# Altium PCB FPGA_MAIN.PcbDoc
Units mm, origin at the board's own origin, x right, y up, seen from the top; angles counter-clockwise.
Board outline 32.89 x 102.62 mm, 2 copper layers (Top Layer, Bottom Layer); 11 components, 56 nets, 161 pads, 127 vias.
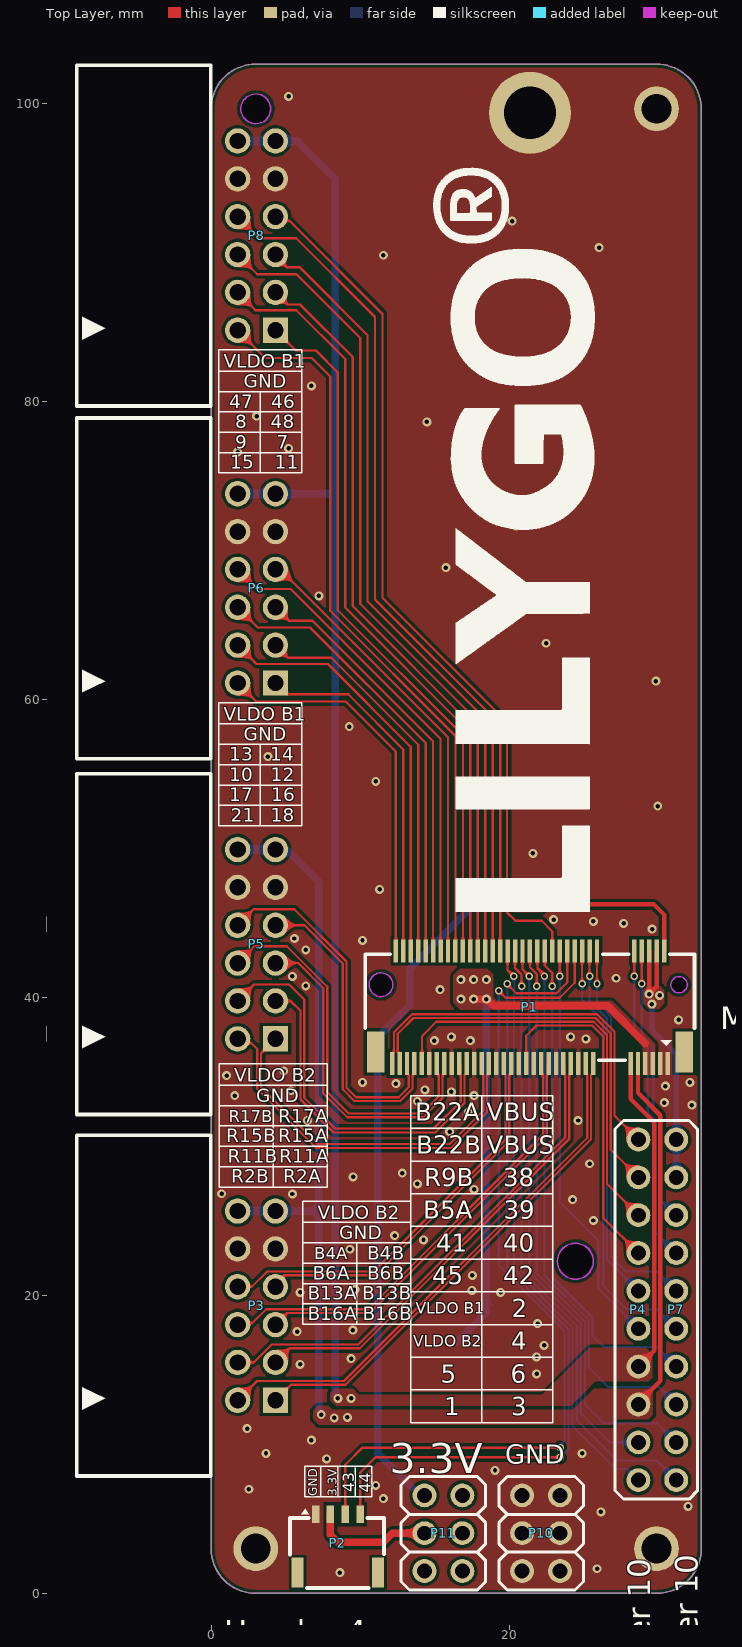
[diagram p0: Top Layer view]
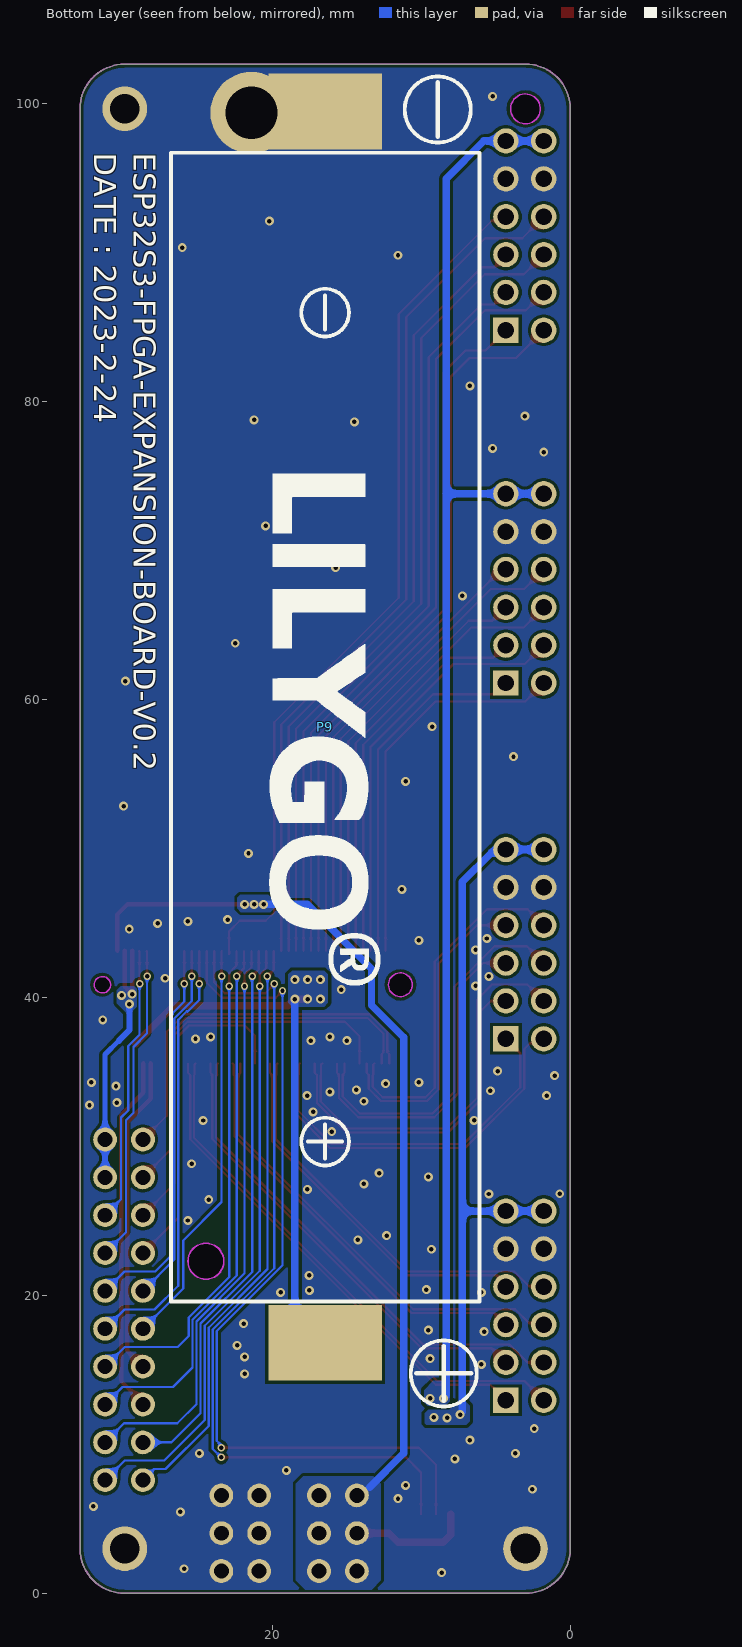
[diagram p1: Bottom Layer view, seen from below]

## Layer stack, top to bottom
Top Solder: solder mask 0.0102, Solder Resist, Dk 3.5
Top Layer: signal copper 0.0356
Dielectric 1: dielectric 0.32, FR-4, Dk 4.8
Bottom Layer: signal copper 0.0356
Bottom Solder: solder mask 0.0102, Solder Resist, Dk 3.5

## Board outline
0,3 0,99.616 cw(c3,99.616) 3,102.616 29.893,102.616 cw(c29.893,99.616) 32.893,99.616 32.893,99.568 32.893,3 cw(c29.893,3) 29.893,0 3,0 cw(c3,3)
cut-out: 3,98.616 cw(c3,99.616) 2,99.616 cw(c3,99.616) 3,100.616 cw(c3,99.616) 4,99.616 cw(c3,99.616)

## Design rules (kind name [scope] priority, off if disabled: settings)
Clearance [InNet('GND')] p1: gap=0.2 ignorepadtopadclearanceinfootprint=TRUE
Clearance Clearance_1 [All] p2: gap=0.102 ignorepadtopadclearanceinfootprint=TRUE
HoleToHoleClearance [All] p1: gap=0 allowstackedmicrovias=TRUE
MinimumSolderMaskSliver [All] p1: minsoldermaskwidth=0
PolygonConnect [All] p1: connectstyle=Direct reliefconductorwidth=0.254 reliefentries=4 polygonreliefangle="90 Angle" airgapwidth=0.254
RoutingVias [All] p1: holewidth=0.3 width=0.5 viastyle="Through Hole" minholewidth=0.25 minwidth=0.4 maxholewidth=10 maxwidth=10
SilkToSilkClearance [All] p1: silktosilkclearance=0
SilkToSolderMaskClearance [IsPad] p1: minsilkscreentomaskgap=0 clearancetoexposedcopper=TRUE
SolderMaskExpansion [All] p1: expansion=0.102 istentingtop=FALSE
Width [All] p1: maxlimit=0.508 minlimit=0.102 preferedwidth=0.203
26 further rules are at their usual default settings.

## Components (designator, comment, footprint, x,y, rotation, side; value= is the part's Value field where it differs from the comment)
P1 "M.2_B_KEY" "M.2 B KEY M" 21.396,39.335 r180 top
P2 "Header 4" H-Header_4P-1.0mm 8.508,3.356 r0 top
P3 "H_PMOD_6x2" "PMOD 6x2" 3.048,19.304 r270 top
P4 "Header 10" 10P_HDR 28.674,19.024 r90 top
P5 "H_PMOD_6x2" "PMOD 6x2" 3.048,43.561 r270 top
P6 "H_PMOD_6x2" "PMOD 6x2" 3.048,67.437 r270 top
P7 "Header 10" 10P_HDR 31.214,19.024 r270 top
P8 "H_PMOD_6x2" "PMOD 6x2" 3.048,91.109 r270 top
P9 "Header 2" BAT电池盒 16.446,58.128 r0 bottom
P10 "Header 3X2" HDR_3x2 22.429,3.81 r90 top
P11 "Header 3X2" HDR_3x2 15.875,3.81 r90 top

## Footprints (in the part's own frame and the unit in brackets; to place one, negate y for a bottom-side part, rotate by r counter-clockwise, add the part's x,y. Pads: shape width x height; smd on the part's side, far side on the other; paste and mask are expansions set on the pad)
10P_HDR [mm]
  round 1.6 hole 1 paste+0: 1(-11.43,0) 2(-8.89,0) 3(-6.35,0) 4(-3.81,0) 5(-1.27,0) 6(1.27,0) 7(3.81,0) 8(6.35,0) 9(8.89,0) 10(11.43,0)
BAT电池盒 [mil]
  rect 300x200 smd mask+2: 1(0,-1626.5) 2(0,1626.5)
  Keep-Out Layer board cut-out: 362.2,1411.02 357.53,1431.52 344.42,1447.96 325.47,1457.08 304.45,1457.08 285.5,1447.96 272.39,1431.52 267.72,1411.02 267.72,1411.02 272.39,1390.52 285.5,1374.08 304.45,1364.96 325.47,1364.96 344.42,1374.08 357.53,1390.52 362.2,1411.02
  silkscreen extent -407,-1518 408,1518
H-Header_4P-1.0mm [mm]
  rect 0.5x1.2 smd: 1(-1.5,1.95) 2(-0.5,1.95) 3(0.5,1.95) 4(1.5,1.95)
  rect 0.8x2 smd: 5(2.7,-1.95) 6(-2.7,-1.95)
  silkscreen extent -3.22,-3 3.1,2.33
HDR_3x2 [mm]
  round 1.6 hole 1 paste+0: 1(-2.314,-0.984) 2(0.226,-0.984) 3(2.766,-0.984) 4(2.766,1.556) 5(0.226,1.556) 6(-2.314,1.556)
  silkscreen extent -3.58,-2.55 4.04,3.13, body extent -3.58,-2.25 4.04,2.83, height 6.17
"M.2 B KEY M" [mm]
  rect 0.3x1.55 smd mask+0.051: 1(-9.25,3.775) 2(-9,-3.775) 3(-8.75,3.775) 4(-8.5,-3.775) 5(-8.25,3.775) 6(-8,-3.775) 7(-7.75,3.775) 8(-7.5,-3.775) 9(-7.25,3.775) 10(-7,-3.775) 11(-6.75,3.775) 20(-4.5,-3.775) 21(-4.25,3.775) 22(-4,-3.775) 23(-3.75,3.775) 24(-3.5,-3.775) 25(-3.25,3.775) 26(-3,-3.775) 27(-2.75,3.775) 28(-2.5,-3.775) 29(-2.25,3.775) 30(-2,-3.775) 31(-1.75,3.775) 32(-1.5,-3.775) 33(-1.25,3.775) 34(-1,-3.775) 35(-0.75,3.775) 36(-0.5,-3.775) 37(-0.25,3.775) 38(0,-3.775) 39(0.25,3.775) 40(0.5,-3.775) 41(0.75,3.775) 42(1,-3.775) 43(1.25,3.775) 44(1.5,-3.775) 45(1.75,3.775) 46(2,-3.775) 47(2.25,3.775) 48(2.5,-3.775) 49(2.75,3.775) 50(3,-3.775) 51(3.25,3.775) 52(3.5,-3.775) 53(3.75,3.775) 54(4,-3.775) 55(4.25,3.775) 56(4.5,-3.775) 57(4.75,3.775) 58(5,-3.775) 59(5.25,3.775) 60(5.5,-3.775) 61(5.75,3.775) 62(6,-3.775) 63(6.25,3.775) 64(6.5,-3.775) 65(6.75,3.775) 66(7,-3.775) 67(7.25,3.775) 68(7.5,-3.775) 69(7.75,3.775) 70(8,-3.775) 71(8.25,3.775) 72(8.5,-3.775) 73(8.75,3.775) 74(9,-3.775) 75(9.25,3.775)
  rect 1.2x2.75 smd mask+0.051: 76(-10.35,3) 77(10.35,3)
  Keep-Out Layer board cut-out: -9.45,-1.5 -9.504,-1.261 -9.657,-1.07 -9.878,-0.964 -10.122,-0.964 -10.343,-1.07 -10.496,-1.261 -10.55,-1.5 -10.55,-1.5 -10.496,-1.739 -10.343,-1.93 -10.122,-2.036 -9.878,-2.036 -9.657,-1.93 -9.504,-1.739 -9.45,-1.5
  Keep-Out Layer board cut-out: 10.8,-1.5 10.721,-1.153 10.499,-0.874 10.178,-0.72 9.822,-0.72 9.501,-0.874 9.279,-1.153 9.2,-1.5 9.2,-1.5 9.279,-1.847 9.501,-2.125 9.822,-2.28 10.178,-2.28 10.499,-2.125 10.721,-1.847 10.8,-1.5
  silkscreen extent -11.05,-3.56 11.05,3.56
"PMOD 6x2" [mm]
  rect 1.7x1.7 hole 1.1 mask+0.05: 1(6.35,1.27)
  round 1.7 hole 1.1 mask+0.05: 2(6.35,-1.27) 3(3.81,1.27) 4(3.81,-1.27) 5(1.27,1.27) 6(1.27,-1.27) 7(-1.27,1.27) 8(-1.27,-1.27) 9(-3.81,1.27) 10(-3.81,-1.27) 11(-6.35,1.27) 12(-6.35,-1.27)
  silkscreen extent -11.43,-12.07 11.43,-3.07

## Part data
P2: library part H_Header_4
P4 P7: library part H_Header_10
P9: library part H_Header_2
P10 P11: library part H_Header_3X2

## Free pads (board coordinates)
  round 3 hole 2: 1(3,3) 1(29.893,3) 1(29.893,99.616)
  round 5.5 hole 3.5: 1(21.396,99.349)

## Via types
v1: diameter 0.6, hole 0.3, Top Layer to Bottom Layer, tented both sides, 111 vias
v2: diameter 0.5, hole 0.3, Top Layer to Bottom Layer, tented both sides, 16 vias

## Nets (pads, with @x,y where several pads share a name; then routed paths per layer and width w, separated by ;. In a path a pad name is that pad's centre, name@x,y a point inside that pad or via, vN(x,y) a via of type N, cw(c..) or ccw(c..) an arc to the next point about the centre after c; other vN are vias at no path point)
FPGA_IOB4A: P1.45 P3.8 | length 27.2
  Top Layer w0.152: P3.8 1.809,20.605 2.767,20.605 3.764,21.602 10.901,21.602 19.751,30.452 19.751,34.772 19.72,34.803 19.72,35.486 P1.45
FPGA_IOB4B: P1.43 P3.7 | length 25.1
  Top Layer w0.152: P3.7 4.318,20.722 4.943,21.348 11.007,21.348 20.005,30.346 20.005,34.794 20.146,34.935 P1.43
FPGA_IOB5A: P1.39 P4.7 | length 23.1
  Top Layer w0.152: P1.39 21.146,37.413 21.834,38.101 25.58,38.101 26.316,37.365 26.316,25.192 P4.7
FPGA_IOB6A: P1.35 P3.6 | length 30.6
  Top Layer w0.152: P3.6 1.878,18.134 2.767,18.134 3.695,19.062 10.54,19.062 22.269,30.791 22.269,34.812 22.146,34.935 P1.35
FPGA_IOB6B: P1.33 P3.5 | length 28.4
  Top Layer w0.152: P3.5 5.092,18.808 10.645,18.808 22.523,30.686 22.523,34.751 22.572,34.8 22.572,35.486 P1.33
FPGA_IOB13A: P1.29 P3.4 | length 33.3
  Top Layer w0.152: P3.4 2.864,15.494 4.069,16.699 9.878,16.699 23.77,30.591 23.77,34.74 23.72,34.79 23.72,35.486 P1.29
FPGA_IOB13B: P1.27 P3.3 | length 31
  Top Layer w0.152: P3.3 5.267,16.443 9.981,16.443 24.024,30.486 24.024,34.813 24.146,34.935 P1.27
FPGA_IOB16A: P1.23 P3.2 | length 35.8
  Top Layer w0.152: P3.2 3.076,14.252 8.921,14.252 25.241,30.573 25.241,34.772 25.22,34.794 25.22,35.486 P1.23
FPGA_IOB16B: P1.21 P3.1 | length 33.6
  Top Layer w0.152: P3.1 5.362,13.998 9.026,13.998 25.495,30.468 25.495,34.785 25.646,34.935 P1.21
FPGA_IOB22A: P1.75 P4.10 | length 25.8
  Top Layer w0.152: P1.75 12.146,36.185 12.271,36.309 12.271,37.648 13.484,38.862 25.895,38.862 27.076,37.68 27.076,32.051 P4.10
FPGA_IOB22B: P1.73 P4.9 | length 27.6
  Top Layer w0.152: P1.73 12.646,36.185 12.524,36.307 12.524,37.543 13.589,38.608 25.79,38.608 26.823,37.575 26.823,29.764 P4.9
FPGA_IOR2A: P1.51 P5.1 | length 24.3
  Top Layer w0.152: P5.1 3.352,36.245 3.352,33.956 7.161,30.148 16.013,30.148 18.257,32.391 18.257,34.772 18.22,34.809 18.22,35.486 P1.51
FPGA_IOR2B: P1.49 P5.2 | length 25.7
  Top Layer w0.152: P5.2 2.071,36.918 2.705,36.918 3.089,36.534 3.089,33.86 7.061,29.888 16.113,29.888 18.511,32.286 18.511,34.8 18.646,34.935 P1.49
FPGA_IOR9B: P1.67 P4.8 | length 28
  Top Layer w0.152: P1.67 14.146,37.387 15.113,38.354 25.685,38.354 26.569,37.47 26.569,27.478 P4.8
FPGA_IOR11A: P1.55 P5.3 | length 23.4
  Top Layer w0.152: P5.3 5.334,39.751 5.993,39.092 5.993,33.145 8.207,30.931 15.034,30.931 16.999,32.896 16.999,34.788 17.146,34.935 P1.55
FPGA_IOR11B: P1.57 P5.4 | length 26.7
  Top Layer w0.152: P5.4 2.882,40.855 5.246,40.855 6.247,39.854 6.247,33.25 8.312,31.185 14.929,31.185 16.745,33.001 16.745,34.772 16.72,34.797 16.72,35.486 P1.57
FPGA_IOR15A: P1.61 P5.5 | length 22.5
  Top Layer w0.152: P5.5 5.842,42.291 7.532,40.601 7.532,33.54 9.131,31.94 14.228,31.94 15.523,33.236 15.523,34.812 15.646,34.935 P1.61
FPGA_IOR15B: P1.63 P5.6 | length 25.5
  Top Layer w0.152: P5.6 2.901,43.414 5.078,43.414 7.786,40.706 7.786,33.645 9.236,32.194 14.122,32.194 15.269,33.341 15.269,34.812 15.146,34.935 P1.63
FPGA_IOR17A: P1.69 P5.7 | length 21.1
  Top Layer w0.152: P5.7 6.261,44.831 8.83,42.262 8.83,33.825 9.611,33.043 12.69,33.043 13.513,33.866 13.513,34.802 13.646,34.935 P1.69
FPGA_IOR17B: P1.71 P5.8 | length 24
  Top Layer w0.152: P5.8 2.853,45.906 5.577,45.906 9.084,42.399 9.084,33.93 9.717,33.297 12.585,33.297 13.259,33.971 13.259,34.76 13.22,34.8 13.22,35.486 P1.71
GND: P1.1 P1.3 P1.25 P1.31 P1.37 P1.41 P1.47 P1.53 P1.59 P1.65 P2.1 P3.9 P3.10 P5.9 P5.10 P6.9 P6.10 P8.9 P8.10 P9.1 P10.1 P10.2 P10.3 P10.4 P10.5 P10.6 pad.1
  other v1: 8.636,1.397 25.908,1.651 26.162,5.461 32.004,5.842 11.557,6.35 2.54,6.985 11.049,7.239 19.05,8.255 7.747,9.017 3.683,9.398 24.892,9.398 6.731,10.287 2.413,11.049 21.844,14.732 5.969,15.367 9.398,15.748 21.843,15.868 22.352,16.637 5.777,17.565 9.516,17.658 21.912,18.096 5.969,20.193 19.431,20.193 17.5,20.33 9.647,20.379 17.526,21.336 9.319,23.092 14.253,23.713 12.319,24.003 25.654,25.019 24.257,26.416 5.461,26.797 0.705,26.816 17.645,27.102 13.841,27.481 9.525,27.94 12.827,28.194 25.4,28.829 16.002,30.988 6.457,31.733 24.635,31.729 17.256,32.314 32.258,32.766 30.419,32.926 13.843,33.02 1.586,33.402 17.653,33.401 16.129,33.655 5.356,33.724 14.351,33.782 30.48,34.036 12.394,34.205 10.16,34.29 32.131,34.29 1.043,34.738 4.873,35.045 14.986,37.084 17.399,37.084 25.146,37.211 16.129,37.338 24.13,37.338 31.369,38.481 15.367,40.513 6.35,40.767 27.178,41.275 5.461,41.402 6.35,43.18 10.16,43.815 5.588,43.942 29.591,44.577 27.686,44.958 25.654,45.085 22.987,45.212 11.303,47.244 21.59,49.657 29.972,52.832 11.049,54.483 3.808,56.153 9.271,58.166 29.845,61.214 22.479,63.754 7.239,66.929 15.748,68.834 20.447,71.628 1.778,76.581 5.207,76.835 14.478,78.613 21.209,78.74 3.048,78.994 6.731,81.026 11.557,89.789 26.035,90.297 20.193,92.075 5.207,100.457
GPIO1: P1.44 P4.1 | length 39.6
  Top Layer w0.152: P1.44 19.896,41.826 v2@20.32,41.402
  Bottom Layer w0.152: v2(20.32,41.41) 20.32,21.757 24.258,17.819 24.258,11.236 27.152,8.343 27.925,8.343 P4.1
GPIO2: P1.34 P7.7 | length 33.6
  Top Layer w0.152: P1.34 22.396,42.127 22.883,41.64 v2(22.883,40.739)
  Bottom Layer w0.152: v2(22.883,40.739) 22.883,21.225 25.597,18.511 25.597,17.272 26.34,16.529 29.898,16.529 P7.7
GPIO3: P1.42 P7.10 | length 41.5
  Top Layer w0.152: P1.42 20.396,41.961 20.833,41.524 v2(20.833,40.739)
  Bottom Layer w0.152: v2(20.833,40.739) 20.833,21.649 24.529,17.953 24.529,11.637 27.249,8.917 29.891,8.917 P7.10
GPIO4: P1.36 P7.8 | length 37.1
  Top Layer w0.152: P1.36 21.896,41.985 ; v2(22.371,41.41) 22.371,41.447 21.896,41.921 21.896,41.985 ; v2@22.47,41.41 21.896,41.985
  Bottom Layer w0.152: v2(22.371,41.41) 22.371,21.324 25.343,18.351 25.343,17.167 25.344,17.166 25.344,15.162 26.657,13.849 30.038,13.849 P7.8
GPIO5: P1.40 P4.2 | length 37.4
  Top Layer w0.152: P1.40 20.896,41.86 v2(21.345,41.41) ; v2@21.361,41.426 v2@21.382,41.405
  Bottom Layer w0.152: v2(21.345,41.41) 21.345,21.57 24.807,18.108 24.807,12.078 26.751,10.134 P4.2
GPIO6: P1.38 P7.9 | length 39.1
  Top Layer w0.152: P1.38 21.396,42.016 21.858,41.554 v2(21.858,40.739)
  Bottom Layer w0.152: v2(21.858,40.739) 21.858,21.472 25.084,18.246 25.084,12.697 26.37,11.411 29.936,11.411 P7.9
GPIO7: P1.52 P8.3 | length 50.3
  Top Layer w0.152: P8.3 5.126,86.491 5.965,86.491 9.501,82.955 9.501,66.248 17.896,57.853 P1.52
GPIO8: P1.50 P8.6 | length 55.1
  Top Layer w0.152: P8.6 3.104,88.513 5.729,88.513 10.001,84.241 10.001,66.405 18.396,58.01 P1.50
GPIO9: P1.54 P8.4 | length 52.3
  Top Layer w0.152: P8.4 2.971,86.106 5.715,86.106 9.001,82.82 9.001,66.146 17.396,57.751 P1.54
GPIO10: P1.66 P6.6 | length 30.3
  Top Layer w0.152: P6.6 3.127,64.818 6.642,64.818 14.396,57.064 P1.66
GPIO11: P1.56 P8.1 | length 47.6
  Top Layer w0.152: P8.1 5.685,83.392 7.031,83.392 8.496,81.926 8.496,65.975 16.896,57.576 P1.56
GPIO12: P1.64 P6.5 | length 28.4
  Top Layer w0.152: P6.5 5.215,65.27 6.81,65.27 14.896,57.184 P1.64
GPIO13: P1.62 P6.8 | length 32.6
  Top Layer w0.152: P6.8 3.086,67.399 5.341,67.399 15.396,57.343 P1.62
GPIO14: P1.60 P6.7 | length 30.6
  Top Layer w0.152: P6.7 4.634,68.707 15.896,57.445 P1.60
GPIO15: P1.58 P8.2 | length 49.5
  Top Layer w0.152: P8.2 3.634,82.903 6.759,82.903 8.001,81.661 8.001,65.929 16.396,57.534 P1.58
GPIO16: P1.68 P6.3 | length 26.2
  Top Layer w0.152: P6.3 5.159,62.786 8.054,62.786 13.896,56.945 P1.68
GPIO17: P1.70 P6.4 | length 28.1
  Top Layer w0.152: P6.4 3.048,62.357 7.839,62.357 13.396,56.8 P1.70
GPIO18: P1.72 P6.1 | length 23.9
  Top Layer w0.152: P6.1 5.08,60.325 9.201,60.325 12.896,56.63 P1.72
GPIO21: P1.74 P6.2 | length 25.9
  Top Layer w0.152: P6.2 3.025,59.84 9.041,59.84 12.396,56.485 P1.74
GPIO38: P1.8 P7.3 | length 18.8
  Top Layer w0.152: v2(28.896,40.894) P1.8 P1.8@28.926,43.08 ; v2@28.926,40.924 v2@28.956,40.894
  Bottom Layer w0.152: v2(28.896,40.894) 28.896,37.489 29.664,36.721 29.664,32.405 30.142,31.927 30.142,26.445 P7.3
GPIO39: P1.10 P7.4 | length 21.5
  Top Layer w0.152: v2(28.396,41.402) P1.10 P1.10@28.422,43.084 ; v2@28.422,41.428 v2@28.448,41.402
  Bottom Layer w0.152: v2@28.396,41.402 28.396,37.576 29.304,36.669 29.304,32.258 29.817,31.745 29.817,24.231 P7.4
GPIO40: P1.20 P7.5 | length 28.4
  Top Layer w0.152: v2(25.896,40.894) P1.20 25.902,43.104 25.902,40.9 v2@25.908,40.894
  Bottom Layer w0.152: v2(25.896,40.894) 25.896,39.718 26.671,38.943 26.671,38.835 26.842,38.664 26.842,22.599 27.851,21.59 29.917,21.59 P7.5
GPIO41: P1.22 P4.6 | length 25.9
  Top Layer w0.152: v2(25.396,41.402) P1.22 25.398,43.108 25.398,41.404 v2@25.4,41.402
  Bottom Layer w0.152: v2(25.396,41.402) 25.396,39.751 26.572,38.575 26.572,22.395 P4.6
GPIO42: P1.24 P7.6 | length 31.4
  Top Layer w0.152: v2@24.892,40.894 24.894,40.896 24.894,43.108 P1.24 v2(24.896,40.894)
  Bottom Layer w0.152: v2(24.896,40.894) 24.896,39.812 25.686,39.021 ; 25.727,39.062 26.307,38.481 26.307,20.639 27.896,19.05 29.917,19.05 P7.6
GPIO45: P1.30 P4.5 | length 27.6
  Top Layer w0.152: v2@23.368,41.402 v2@23.382,41.416 ; v2@23.396,41.402 23.396,43.082 23.382,43.096 P1.30
  Bottom Layer w0.152: v2@23.396,41.402 23.396,39.723 23.396,26.261 25.976,23.681 25.976,20.451 P4.5
  other v2: 23.396,41.41
GPIO46: P1.32 P8.7 | length 58.6
  Top Layer w0.152: P8.7 4.597,92.1 5.26,92.1 11.509,85.852 11.509,66.805 19.861,58.452 19.861,45.689 20.425,45.125 22.185,45.125 22.896,44.414 P1.32 22.878,43.092 22.878,42.91 P1.32@22.896,42.892
GPIO47: P1.46 P8.8 | length 58
  Top Layer w0.152: P8.8 3.225,90.932 5.715,90.932 11.001,85.646 11.001,66.693 19.396,58.298 P1.46
GPIO48: P1.48 P8.5 | length 53.3
  Top Layer w0.152: P8.5 4.318,89.744 5.068,88.994 5.928,88.994 10.501,84.421 10.501,66.57 18.896,58.175 P1.48
U0RXD: P1.28 P2.4 | length 57.1
  Top Layer w0.152: P2.4 10.008,8.111 11.024,9.127 v2(23.414,9.127) ; v2(19.868,40.911) 19.868,40.879 20.473,40.274 23.177,40.274 23.896,40.993 P1.28
  Bottom Layer w0.152: v2(19.868,40.911) 19.868,21.814 23.98,17.702 23.98,9.693 v2(23.414,9.127)
U0TXD: P1.26 P2.3 | length 58.6
  Top Layer w0.152: P2.3 9.008,8.627 10.16,9.779 v2(23.416,9.779) ; v2(19.308,40.421) 19.761,39.968 23.392,39.968 24.396,40.972 P1.26
  Bottom Layer w0.152: v2(19.308,40.421) 19.308,22.009 23.718,17.6 23.718,10.238 23.483,10.002 23.483,9.846 v2(23.416,9.779)
VBAT: P1.5 P1.7 P9.2 | length 36.7
  Top Layer w0.5: v1@17.609,39.886 17.616,39.879 18.471,39.879 v1(18.477,39.873) 18.504,39.873 18.958,39.42 26.62,39.42 29.146,36.894
  Bottom Layer w0.5: P9.2 18.477,18.846 v1(18.477,39.873)
  other v1: 16.764,39.873 17.621,39.873 16.764,41.184 17.621,41.184 18.477,41.184
VBUS: P1.4 P1.6 P7.1 P7.2 | length 18.3
  Top Layer w0.3: v1@29.396,40.215 v1(29.397,40.217) ; P1.6 29.396,41.586 29.397,41.585 v1(29.397,40.217) ; P1.4 29.896,40.715 v1(29.397,40.217)
  Bottom Layer w0.35: 30.291,37.078 31.214,36.156 P7.1 P7.2
  Bottom Layer w0.4: v1(29.579,39.536) 29.579,37.79 30.291,37.078
  other v1: 30.099,40.132
VDD3_3: P1.2 P2.2 P11.1 P11.2 P11.3 P11.4 P11.5 P11.6 | length 66.3
  Top Layer w0.3: v1(20.574,46.228) 29.718,46.228 30.396,45.55 P1.2
  Top Layer w0.5: P2.2 8.008,3.93 8.509,3.429 11.557,3.429 12.164,4.036 P11.5
  Bottom Layer w0.5: 13.462,7.112 11.186,9.388 11.186,37.302 13.335,39.451 13.335,41.91 17.653,46.228 v1(20.574,46.228)
  other v1: 21.209,46.228 21.844,46.228
VLDO_B1: P1.11 P4.4 P6.11 P6.12 P8.11 P8.12 | length 117.2
  Top Layer w0.3: P1.11 28.146,33.195 29.725,31.616 29.725,16.265 P4.4
  Bottom Layer w0.5: P6.12 P6.11 8.331,73.787 ; P8.12 P8.11 5.792,97.459 8.331,94.92 8.331,73.787 ; v1@8.331,13.286 8.331,73.787
  other v1: 8.509,13.081 9.398,13.081
VLDO_B2: P1.9 P3.11 P3.12 P4.3 P5.11 P5.12 | length 73.4
  Top Layer w0.3: P4.3@28.067,12.674 28.316,12.923 28.813,12.923 30.142,14.252 30.142,32.088 28.646,33.584 P1.9
  Bottom Layer w0.5: P3.12 7.236,25.654 ; P5.12 P5.11 ; v1(7.392,11.989) 7.392,12.017 7.236,12.172 7.236,25.654 ; P5.11 5.08,49.911 5.318,49.673 ; P5.11 4.556,49.673 5.318,49.673 ; 5.318,49.673 7.236,47.755 7.236,25.654
  other v1: 8.263,11.777 9.144,11.811
pads on no net: P1.76 P1.77 P2.5 P2.6

## Polygon pours and split planes (outlines as drawn)
GND on Bottom Layer "NONET_L-01_P-001" (solid, remove dead copper, pour order 15): 0,3 0,99.616 cw(c3,99.616) 3,102.616 29.893,102.616 cw(c29.893,99.616) 32.893,99.616 32.893,3 cw(c29.893,3) 29.893,0 3,0 cw(c3,3)
VLDO_B1 on Bottom Layer "NONET_L-01_P-001" (solid, remove dead copper, pour order 10): 8.08,12.875 8.08,14.001 8.331,14.252 9.197,14.252 9.809,13.641 9.809,12.809 9.573,12.573 8.382,12.573
VLDO_B2 on Bottom Layer "NONET_L-01_P-001" (solid, remove dead copper, pour order 11): 6.731,11.557 6.985,11.303 9.652,11.303 9.762,11.413 9.762,12.082 9.525,12.319 8.128,12.319 7.452,12.995 7.153,12.995 6.731,12.573
VDD3_3 on Bottom Layer "NONET_L-01_P-001" (solid, remove dead copper, pour order 6): 20.25,46.863 22.15,46.863 22.352,46.661 22.352,45.974 22.098,45.72 20.118,45.72 19.755,46.084 19.755,46.368
VDD3_3 on Bottom Layer "NONET_L-01_P-001" (solid, remove dead copper, pour order 5): 12.7,7.366 13.208,7.874 17.907,7.874 18.415,7.366 18.415,0.889 17.78,0.254 13.335,0.254 12.7,0.889 12.7,7.239
VBUS on Bottom Layer "NONET_L-01_P-001" (solid, remove dead copper, pour order 4): 29.053,39.4 29.053,40.539 29.263,40.749 30.148,40.749 30.417,40.479 30.417,39.585 29.748,38.916 29.537,38.916
VBAT on Bottom Layer "NONET_L-01_P-001" (solid, remove dead copper, pour order 0): 16.256,41.529 16.51,41.783 18.669,41.783 18.923,41.529 18.923,39.635 18.658,39.37 16.51,39.37 16.256,39.624 16.256,41.402
GND on Top Layer "NONET_L-01_P-001" (solid, remove dead copper, pour order 14): 0,3 0,99.616 cw(c3,99.616) 3,102.616 29.893,102.616 cw(c29.893,99.616) 32.893,99.616 32.893,3 cw(c29.893,3) 29.893,0 3,0 cw(c3,3)
VLDO_B2 on Top Layer "NONET_L-01_P-001" (solid, remove dead copper, pour order 13): 6.858,11.684 6.858,12.269 7.162,12.573 7.874,12.573 8.128,12.319 24.257,12.319 25.676,13.738 29.472,13.738 29.637,13.573 29.637,11.974 29.347,11.684 27.295,11.684 26.914,11.303 7.239,11.303
VLDO_B1 on Top Layer "NONET_L-01_P-001" (solid, remove dead copper, pour order 12): 8.001,12.954 8.382,12.573 24.13,12.573 24.892,13.335 25.781,14.224 29.347,14.224 29.591,14.468 29.591,16.053 29.16,16.484 25.374,16.484 22.225,13.335 9.906,13.335 9.525,13.716 8.255,13.716 8.001,13.462
VDD3_3 on Top Layer "NONET_L-01_P-001" (solid, remove dead copper, pour order 7): 20.25,46.863 22.098,46.863 22.606,46.355 22.606,46.101 22.225,45.72 20.32,45.72 20.193,45.847 20.193,46.806
VBUS on Top Layer "NONET_L-01_P-001" (solid, remove dead copper, pour order 3): 29.252,40.738 29.009,40.495 29.009,39.585 29.352,39.243 30.075,39.243 30.417,39.585 30.417,40.479 30.148,40.749
VBAT on Top Layer "NONET_L-01_P-001" (solid, remove dead copper, pour order 1): 18.772,39.159 16.721,39.159 16.256,39.624 16.256,41.465 16.7,41.91 18.542,41.91 18.923,41.529 18.923,40.006 19.178,39.751 26.852,39.751 26.852,39.165
VBAT on Top Layer "NONET_L-01_P-001" (solid, remove dead copper, pour order 2): 28.956,34.79 29.797,34.79 29.797,36.878 26.924,39.751 26.289,39.751 26.289,39.37 28.956,36.703

## Keep-outs
Keep-Out Layer:
  circle w0.1: c24.446,22.288 r1.21
  circle w0.1: c24.446,22.288 r1.203
  circle w0.1: c11.396,40.835 r0.8
  circle w0.1: c31.396,40.835 r0.55
  circle w0.1: c3,99.616 r1
  lines w0.1: 0,3 ccw(c3,3) 3,0 29.893,0 ccw(c29.893,3) 32.893,3 32.893,99.616 ccw(c29.893,99.616) 29.893,102.616 27.953,102.616 3,102.616 ccw(c3,99.616) 0,99.616 0,3

## Silkscreen, mask and mechanical layers (free items; w line width, h text height)
Top Overlay:
  drawing of 91 lines, arcs and shapes, not listed
  text "VLDO B1" at 0.85,82.238 h0.9
  text "GND" at 2.207,80.888 h0.9
  text "47" at 1.204,79.527 h0.9
  text "46" at 4.02,79.527 h0.9
  text "8" at 1.605,78.172 h0.9
  text "48" at 3.998,78.172 h0.9
  text "9" at 1.626,76.816 h0.9
  text "7" at 4.399,76.816 h0.9
  text "15" at 1.275,75.461 h0.9
  text "11" at 4.262,75.461 h0.9
  text "VLDO B1" at 0.85,58.566 h0.9
  text "GND" at 2.207,57.216 h0.9
  text "13" at 1.204,55.855 h0.9
  text "14" at 3.977,55.855 h0.9
  text "10" at 1.204,54.5 h0.9
  text "12" at 3.998,54.5 h0.9
  text "17" at 1.204,53.144 h0.9
  text "16" at 4.02,53.144 h0.9
  text "21" at 1.327,51.789 h0.9
  text "18" at 3.998,51.789 h0.9
  text "VLDO B2" at 1.553,34.326 h0.9
  text "GND" at 3.014,32.97 h0.9
  text "B22A" at 13.709,31.703 h1.2
  text "VBUS" at 18.507,31.703 h1.2
  text "R17B" at 1.191,31.609 h0.8
  text "R17A" at 4.498,31.579 h0.9
  text "R15B" at 1.032,30.254 h0.9
  text "R15A" at 4.498,30.254 h0.9
  text "B22B" at 13.766,29.509 h1.2
  text "VBUS" at 18.507,29.509 h1.2
  text "R11B" at 1.103,28.899 h0.9
  text "R11A" at 4.569,28.899 h0.9
  text "R2B" at 1.362,27.543 h0.9
  text "R2A" at 4.828,27.543 h0.9
  text "R9B" at 14.3,27.314 h1.2
  text "38" at 19.607,27.314 h1.2
  text "VLDO B2" at 7.152,25.12 h0.9
  text "B5A" at 14.243,25.12 h1.2
  text "39" at 19.636,25.12 h1.2
  text "GND" at 8.613,23.763 h0.9
  text "41" at 15.092,22.926 h1.2
  text "40" at 19.607,22.926 h1.2
  text "B4A" at 6.934,22.403 h0.8
  text "B4B" at 10.47,22.373 h0.9
  text "B6A" at 6.831,21.048 h0.9
  text "B6B" at 10.493,21.048 h0.9
  text "45" at 14.835,20.731 h1.2
  text "42" at 19.607,20.731 h1.2
  text "B13A" at 6.477,19.692 h0.9
  text "B13B" at 10.14,19.692 h0.9
  text "VLDO B1" at 13.723,18.756 h0.76
  text "2" at 20.17,18.537 h1.2
  text "B16A" at 6.501,18.337 h0.9
  text "B16B" at 10.163,18.337 h0.9
  text "VLDO B2" at 13.559,16.561 h0.76
  text "4" at 20.141,16.342 h1.2
  text "5" at 15.397,14.148 h1.2
  text "6" at 20.113,14.148 h1.2
  text "1" at 15.654,11.953 h1.2
  text "3" at 20.141,11.953 h1.2
  text "GND" at 19.725,8.275 h2.2
  text "3.3V" at 11.977,8.075 h2
  text "43" at 9.6,6.77 h0.76 r90
  text "44" at 10.724,6.762 h0.76 r90
  text "3.3V" at 8.444,6.524 h0.6 r90
  text "GND" at 7.323,6.501 h1.02 r90
Bottom Overlay:
  drawing of 13 lines, arcs and shapes, not listed
  text "ESP32S3-FPGA-EXPANSION-BOARD-V0.2" at 29.29,96.653 h1.5 r90
  text "DATE : 2023-2-24" at 31.938,96.653 h1.5 r90
Mechanical 1:
  lines w0.1: 8.001,12.954 8.001,13.462 8.255,13.716 9.525,13.716 10.033,13.208 10.033,12.827 9.779,12.573 8.382,12.573 8.001,12.954
Mechanical 3:
  lines w0.1: 6.858,11.684 7.239,11.303 26.914,11.303 27.041,11.43 29.093,11.43 29.637,11.974 29.637,13.374 29.273,13.738 25.676,13.738 24.257,12.319 22.86,12.319 8.128,12.319 7.874,12.573 7.162,12.573 6.858,12.269 6.858,11.684 ; 8.001,12.954 8.001,13.462 8.255,13.716 9.525,13.716 9.906,13.335 22.225,13.335 25.374,16.484 27.067,16.484 29.067,16.484 29.637,15.914 29.637,14.514 29.347,14.224 25.781,14.224 24.892,13.335 24.13,12.573 23.114,12.573 8.382,12.573 8.001,12.954